# Altium PCB SIM908.PcbDoc
Units mil, origin at the board's own origin, x right, y up, seen from the top; angles counter-clockwise.
Board outline 3980.32 x 2716.54 mil, 2 copper layers (Top Layer, Bottom Layer); 100 components, 138 nets, 508 pads, 108 vias.
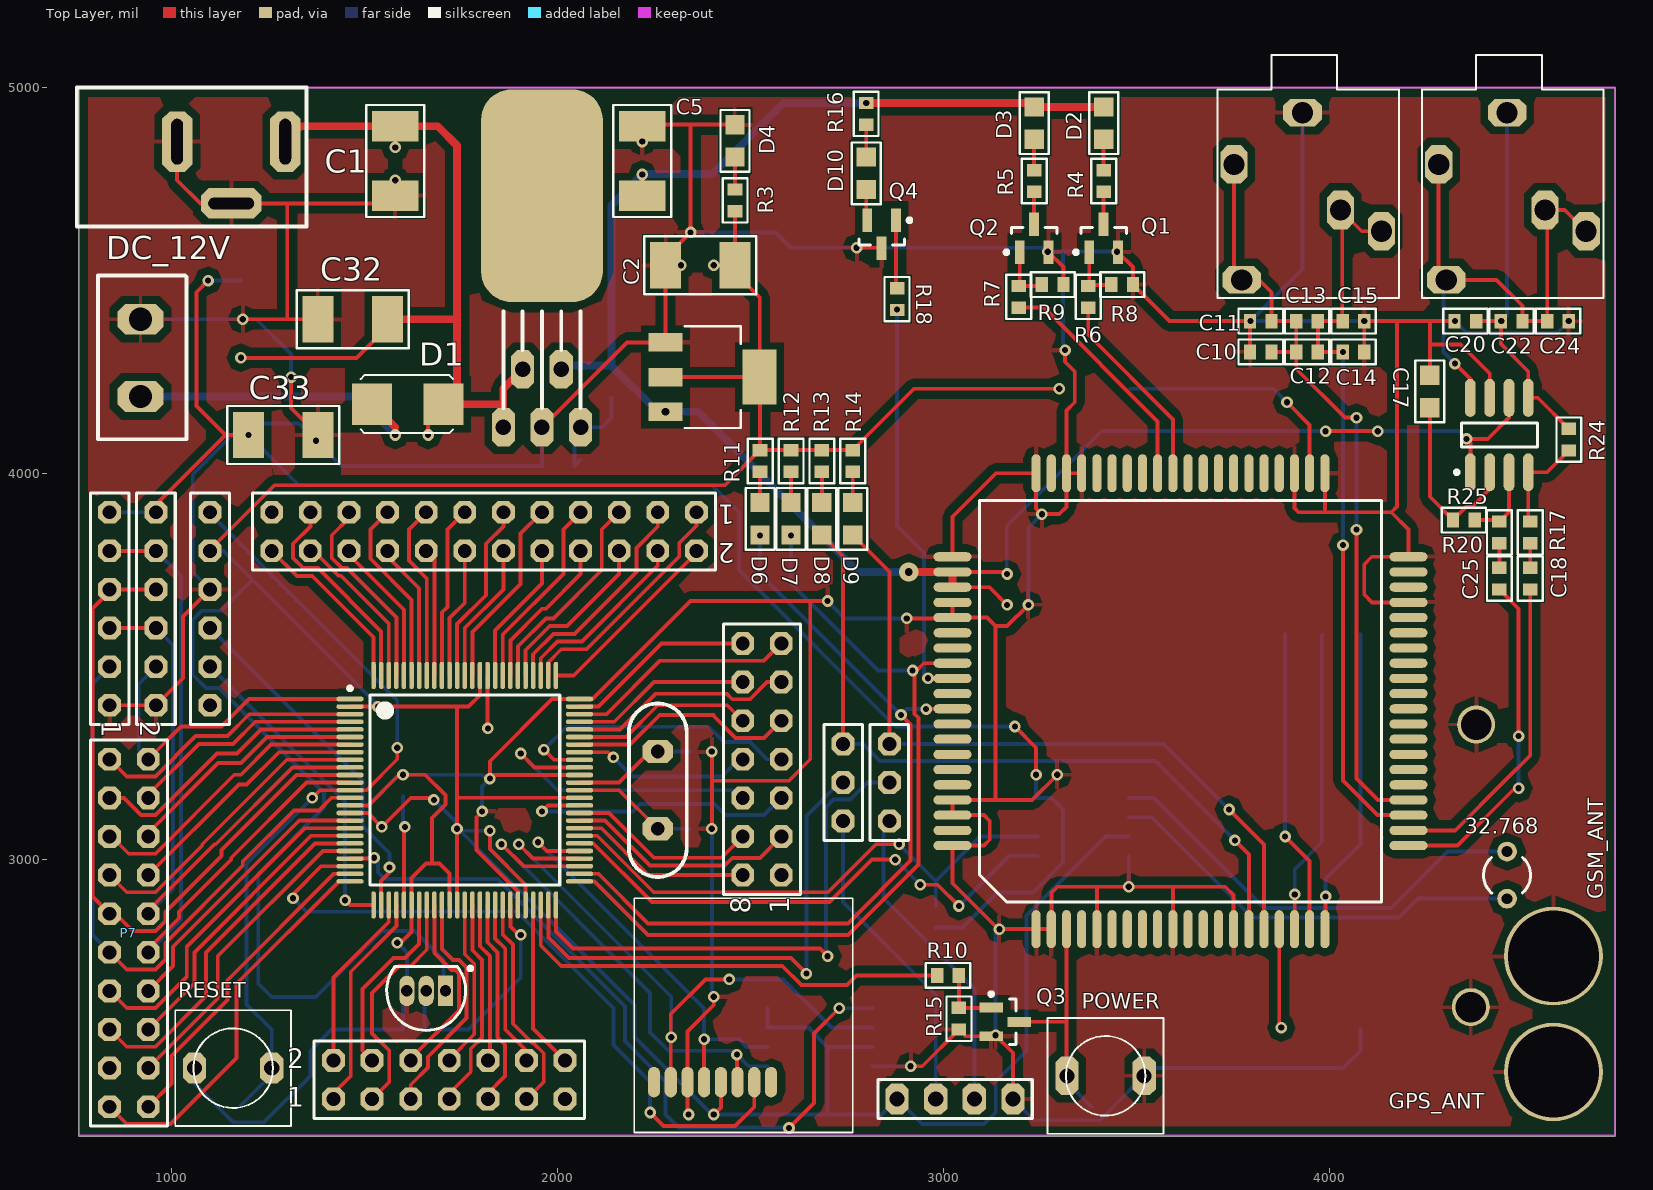
[diagram p0: Top Layer view]
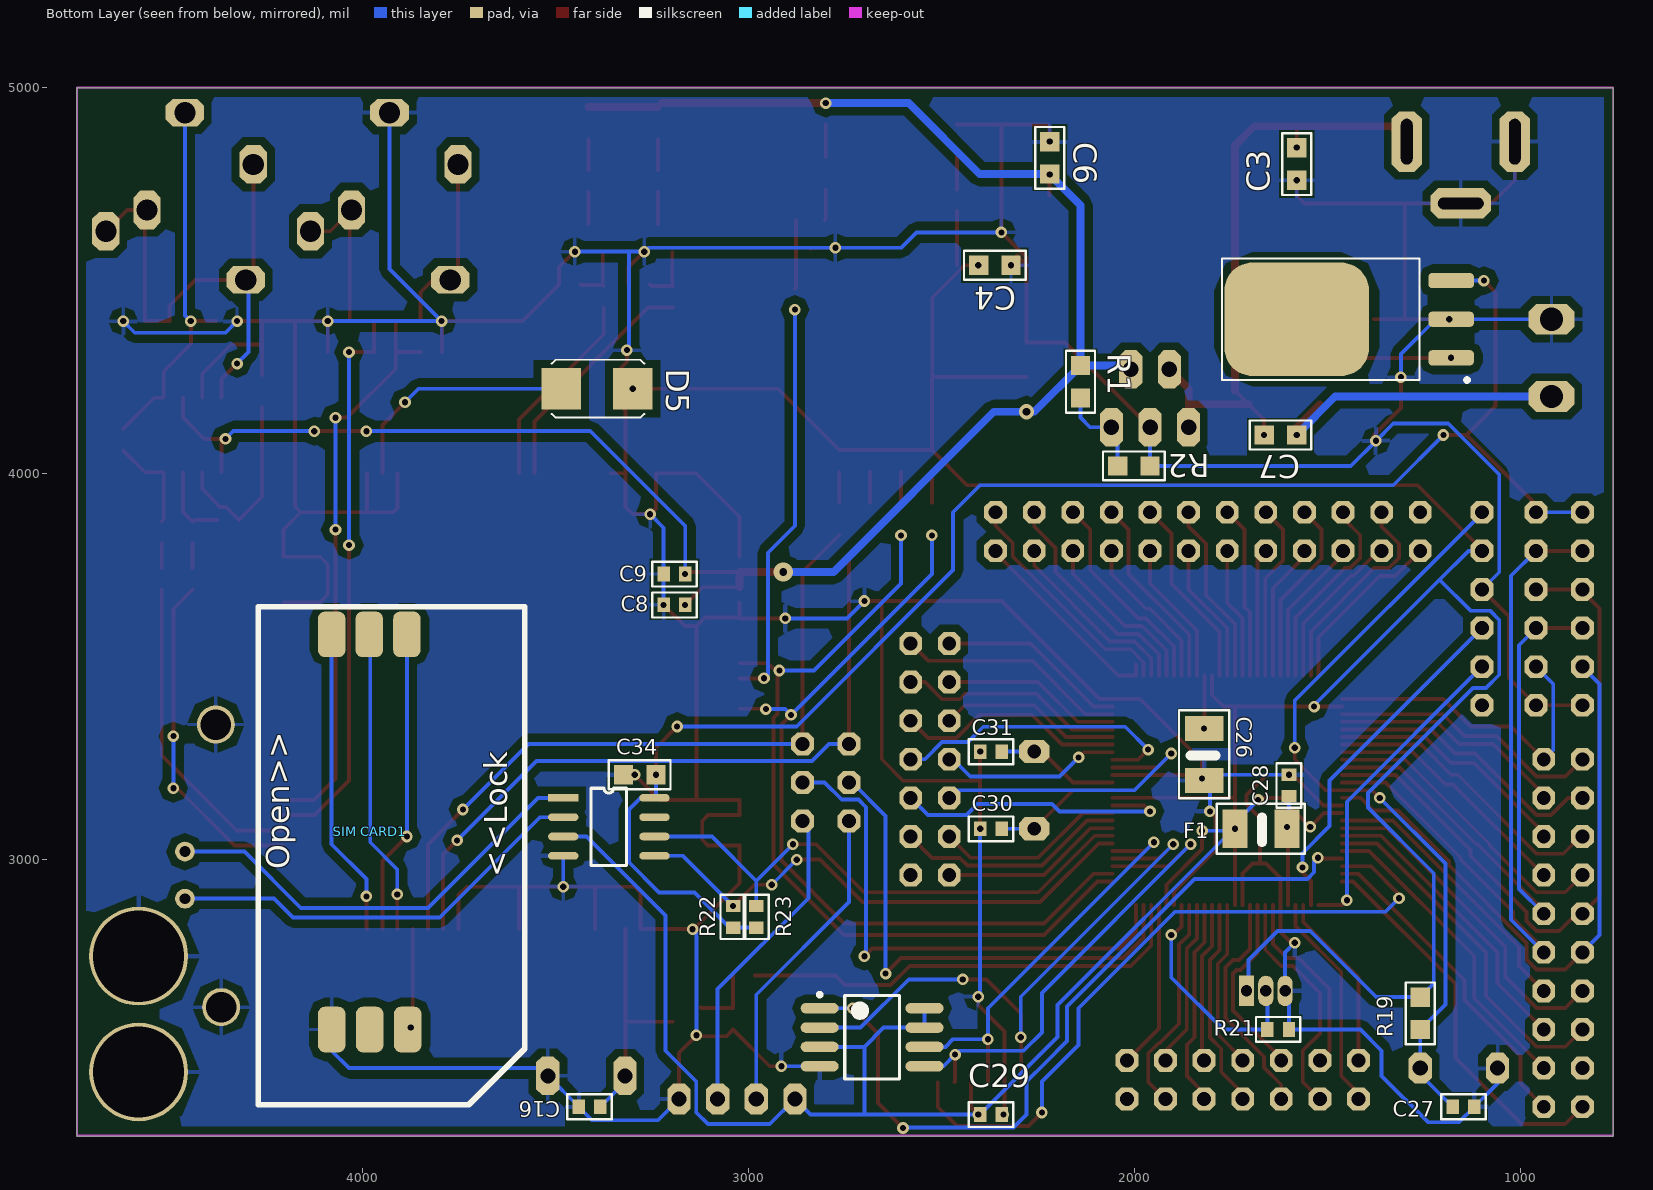
[diagram p1: Bottom Layer view, seen from below]

## Layer stack, top to bottom
Top Layer: signal copper 1.4
Dielectric: dielectric 12.6, FR-4, Dk 4.8
Bottom Layer: signal copper 1.4

## Board outline
759.84,5000 4740.16,5000 4740.16,2283.46 759.84,2283.46 759.84,5000

## Design rules (kind name [scope] priority, off if disabled: settings)
Clearance Clearance_1 [InNamedPolygon('TOP') Or  InNamedPolygon('BOT')] p1: gap=20
Clearance [All] p2: gap=10
FabricationTestPointUsage TestPointUsage [All] p1: valid=0 allowmultiple=FALSE
FabricationTestpoint Testpoint [All] p1: side=3 testpointundercomponent=TRUE minsize=40 maxsize=100 preferedsize=60 minholesize=0 maxholesize=40 preferedholesize=32 testpointgrid=1 allowsidetop=TRUE allowsidebottom=TRUE usegrid=TRUE gridtolerance=0.01
PolygonConnect [All] p1: connectstyle=Relief reliefconductorwidth=10 reliefentries=4 polygonreliefangle="90 Angle"
RoutingVias [All] p1: holewidth=16 width=30 viastyle="Through Hole" minholewidth=16 minwidth=30 maxholewidth=16 maxwidth=30
SilkscreenOverComponentPads [All] p1: minsilkscreentomaskgap=10
SolderMaskExpansion [All] p1: expansion=4
Width [All] p1: maxlimit=10 minlimit=10 preferedwidth=10
25 further rules are at their usual default settings.

## Components (designator, comment, footprint, x,y, rotation, side; value= is the part's Value field where it differs from the comment)
1 "8MHz" CRYSTAL 2260,3280 r270 top
25LC1024 "25LC1024" SOIC208-8_M 2680,2540 r180 bottom
32.768 "XTAL" R38 4460,2960 r0 top (schematic designator 32.768MHz)
C1 "Cap Pol3" SM/C_1812 1580,4900 r270 top
C2 "Cap Pol3" SM/C_1812 2460,4540 r180 top
C3 "Cap" SM/C_0805 1580,4760 r90 bottom
C4 "Cap" SM/C_0805 2320,4540 r0 bottom
C5 "Cap2" SM/C_1812 2220,4720 r90 top
C6 "Cap Semi" SM/C_0805 2220,4860 r270 bottom
C7 "Cap" SM/C_0805 1580,4100 r0 bottom
C8 "Cap" SM/C_0603 3220,3660 r180 bottom
C9 "Cap" SM/C_0603 3220,3740 r180 bottom
C10 "Cap Semi" SM/C_0603 3850,4315 r180 top
C11 "Cap Semi" SM/C_0603 3850,4395 r180 top
C12 "Cap Semi" SM/C_0603 3970,4315 r180 top
C13 "Cap Semi" SM/C_0603 3970,4395 r180 top
C14 "Cap Semi" SM/C_0603 4090,4315 r180 top
C15 "Cap Semi" SM/C_0603 4090,4395 r180 top
C16 "Cap" SM/C_0603 3440,2360 r180 bottom
C17 "Cap" SM/C_0805 4260,4255 r270 top
C18 "Cap" SM/C_0603 4520,3700 r90 top
C20 "Cap Semi" SM/C_0603 4380,4395 r180 top
C22 "Cap Semi" SM/C_0603 4500,4395 r180 top
C24 "Cap Semi" SM/C_0603 4620,4395 r180 top
C25 "Cap" SM/C_0603 4440,3700 r90 top
C26 "Cap Semi" SM/C_1210 1820,3340 r270 bottom
C27 "Cap" SM/C_0603 1120,2360 r0 bottom
C28 "Cap Semi" SM/C_0603 1600,3220 r270 bottom
C29 "Cap" SM/C_0603 2400,2340 r180 bottom
C30 "Cap Semi" SM/C_0603 2400,3080 r180 bottom
C31 "Cap Semi" SM/C_0603 2400,3280 r180 bottom
C32 "Cap" SM/C_1812 1380,4400 r0 top
C33 "Cap" SM/C_1812 1380,4100 r180 top
C34 "Cap" SM/C_0805 3240,3220 r0 bottom
D1 "M7" SM/DO214AA_21 1520,4180 r180 top
D2 "LED0" SM/C_0805 3415,4950 r270 top
D3 "LED0" SM/C_0805 3235,4950 r270 top
D4 "LED0" SM/C_0805 2460,4820 r90 top
D5 "Diode" SM/DO214AA_21 3300,4220 r180 bottom
D6 "LED0" SM/C_0805 2525,3925 r270 top
D7 "LED0" SM/C_0805 2605,3925 r270 top
D8 "LED0" SM/C_0805 2685,3925 r270 top
D9 "LED0" SM/C_0805 2765,3925 r270 top
D10 "LED0" SM/C_0805 2800,4820 r270 top
DC_12V "Jac_DC" Jac_DC 560,4720 r0 top (schematic designator DC_1)
DS1307 "DS1307" DS1307 3480,3160 r180 bottom
F1 "Inductor" SM/C_1210 1740,3080 r180 bottom
LM4871 "LM4871" D008_M 4440,4100 r90 top
MicroSDCard1 "MicroSDCard" "MICROSD CARD" 2640,2900 r180 top
P1 "Battery connector" HEADERCN02B 920,4400 r270 top
P2 "ICD2" HDR1X6 1100,3900 r270 top
P3 "JacAudio" JACK_A_3.5MM_REV5_2 3930,4935 r270 top
P4 "JacAudio" JACK_A_3.5MM_REV5_2 4460,4935 r270 top
P5 "Header 12X2" HDR2X12 2360,3900 r180 top
P6 "Header 7X2" HDR2X7 1420,2380 r0 top
P7 "Header 10X2" HDR2X10 840,3260 r270 top
P8 "Header 7X2A" HDR2X7_CEN 2580,2960 r90 top
P9 "Header 6" HDR1X6 960,3400 r90 top
P10 "Header 3" HDR1X3 2740,3100 r90 top
P11 "Header 3" HDR1X3 2860,3100 r90 top
P12 "Header 4" HDR1X4 2880,2380 r0 top
P13 "Header 6" HDR1X6 840,3400 r90 top
POWER "SW-PB" KEYSMALL2#1 3520,2440 r180 top (schematic designator S1)
Q1 "2N3904" 2N3904 3415,4610 r90 top
Q2 "2N3904" 2N3904 3235,4610 r90 top
Q3 "2N3904" 2N3904 3160,2580 r0 top
Q4 "2N3906" 2N3904 2840,4620 r270 top
R1 "Res Semi" SM/C_0805 2140,4280 r270 bottom
R2 "Res Semi" SM/C_0805 1960,4020 r0 bottom
R3 "Res1" SM/C_0603 2460,4680 r90 top
R4 "Res1" SM/C_0603 3415,4730 r90 top
R5 "Res1" SM/C_0603 3235,4730 r90 top
R6 "Res1" SM/C_0603 3375,4430 r90 top
R7 "Res1" SM/C_0603 3195,4430 r90 top
R8 "Res1" SM/C_0603 3435,4490 r0 top
R9 "Res1" SM/C_0603 3255,4490 r0 top
R10 "Res1" SM/C_0603 3040,2700 r180 top
R11 "Res1" SM/C_0603 2525,4005 r90 top
R12 "Res1" SM/C_0603 2605,4005 r90 top
R13 "Res1" SM/C_0603 2685,4005 r90 top
R14 "Res1" SM/C_0603 2765,4005 r90 top
R15 "Res1" SM/C_0603 3040,2560 r90 top
R16 "Res1" SM/C_0603 2800,4960 r270 top
R17 "Res1" SM/C_0603 4520,3820 r90 top
R18 "Res1" SM/C_0603 2880,4480 r270 top
R19 "Res Semi" SM/C_0805 1260,2560 r90 bottom
R20 "Res1" SM/C_0603 4440,3820 r90 top
R21 "Res1" SM/C_0603 1600,2560 r0 bottom
R22 "Res1" SM/C_0603 3040,2880 r270 bottom
R23 "Res1" SM/C_0603 2980,2880 r270 bottom
R24 "Res1" SM/C_0603 4620,4060 r90 top
R25 "Res1" SM/C_0603 4320,3880 r0 top
RESET "SW-PB" KEYSMALL2#2 1060,2460 r0 top (schematic designator S2)
SIM1 "SIM908" SIM908 3240,2820 r90 top
"SIM CARD1" "SIM CARD" SIMCARD6pin 4080,2560 r90 bottom
U1 "MIC29302ADJ" MIC29302 1860,4120 r0 top
U2 "" SM/SOT223_1234 2280,4340 r270 top
U3 "DSPIC33FJ128MC710T-I/PT" TQFP-PF100_N 1760,3180 r0 top
U4 "LM35CZ" Z03A 1660,2660 r90 top
UA7805C "UA7805C" UA7805C 1380,4400 r0 bottom

## Footprints (in the part's own frame and the unit in brackets; to place one, negate y for a bottom-side part, rotate by r counter-clockwise, add the part's x,y. Pads: shape width x height; smd on the part's side, far side on the other; paste and mask are expansions set on the pad)
2N3904 [mm] "2N3904"
  rect 1.55x0.65 smd: 1(-0.925,-0.95) 2(-0.925,0.95) 3(0.925,0)
  silkscreen extent -1.05,-1.5 0.7,1.95, body extent -0.7,-1.5 0.7,1.5, height 1.1
CRYSTAL [mil]
  oct 60x80 hole 36: 1(0,0) 2(200,0)
  silkscreen extent -125,-75 325,75
D008_M [mm] "8-Pin Small Outline Integrated Circuit 1.27 mm Pitch, IPC Low Density"
  oval 2.5x0.7 smd: 1(-2.45,1.905) 2(-2.45,0.635) 3(-2.45,-0.635) 4(-2.45,-1.905) 5(2.45,-1.905) 6(2.45,-0.635) 7(2.45,0.635) 8(2.45,1.905)
  silkscreen extent -2.57,-2.5 0.8,2.93, body extent -2,-2.5 2,2.5, height 1.75
DS1307 [mm]
  rect 2x0.5 smd: 1(0,0)
  oval 2x0.5 smd: 2(0,-1.27) 3(0,-2.54) 4(0,-3.81) 5(6,-3.81) 6(6,-2.54) 7(6,-1.27) 8(6,0)
  silkscreen extent 1.84,-4.45 4.17,0.63
HDR1X3 [mm] "Connector; Header; 3 Position"
  oct 1.5x1.5 hole 0.914: 1(0,0) 2(2.54,0) 3(5.08,0)
  silkscreen extent -1.27,-1.27 6.35,1.27
HDR1X4 [mil] "Connector; Header; 4 Position"
  oct 60x80 hole 39: 1(0,0) 2(100,0) 3(200,0) 4(300,0)
  silkscreen extent -50,-50 350,50
HDR1X6 [mm] "Connector; Header; 6 Position"
  oct 1.5x1.5 hole 0.914: 1(0,0) 2(2.54,0) 3(5.08,0) 4(7.62,0) 5(10.16,0) 6(12.7,0)
  silkscreen extent -1.27,-1.27 13.97,1.27
HDR2X7 [mm] "Connector; Header; 7x2 Position"
  oct 1.5x1.5 hole 0.914: 1(0,0) 2(0,2.54) 3(2.54,0) 4(2.54,2.54) 5(5.08,0) 6(5.08,2.54) 7(7.62,0) 8(7.62,2.54) 9(10.16,0) 10(10.16,2.54) 11(12.7,0) 12(12.7,2.54) 13(15.24,0) 14(15.24,2.54)
  silkscreen extent -1.27,-1.27 16.51,3.81
HDR2X7_CEN [mm] "Connector; Header; 7x2 Position"
  oct 1.5x1.5 hole 0.914: 1(0,0) 2(2.54,0) 3(5.08,0) 4(7.62,0) 5(10.16,0) 6(12.7,0) 7(15.24,0) 8(0,2.54) 9(2.54,2.54) 10(5.08,2.54) 11(7.62,2.54) 12(10.16,2.54) 13(12.7,2.54) 14(15.24,2.54)
  silkscreen extent -1.27,-1.27 16.51,3.81
HDR2X10 [mm] "Connector; Header; 10x2 Position"
  oct 1.5x1.5 hole 0.914: 1(0,0) 2(0,2.54) 3(2.54,0) 4(2.54,2.54) 5(5.08,0) 6(5.08,2.54) 7(7.62,0) 8(7.62,2.54) 9(10.16,0) 10(10.16,2.54) 11(12.7,0) 12(12.7,2.54) 13(15.24,0) 14(15.24,2.54) 15(17.78,0) 16(17.78,2.54) 17(20.32,0) 18(20.32,2.54) 19(22.86,0) 20(22.86,2.54)
  silkscreen extent -1.27,-1.27 24.13,3.81
HDR2X12 [mm] "Connector; Header; 12x2 Position"
  oct 1.5x1.5 hole 0.914: 1(0,0) 2(0,2.54) 3(2.54,0) 4(2.54,2.54) 5(5.08,0) 6(5.08,2.54) 7(7.62,0) 8(7.62,2.54) 9(10.16,0) 10(10.16,2.54) 11(12.7,0) 12(12.7,2.54) 13(15.24,0) 14(15.24,2.54) 15(17.78,0) 16(17.78,2.54) 17(20.32,0) 18(20.32,2.54) 19(22.86,0) 20(22.86,2.54) 21(25.4,0) 22(25.4,2.54) 23(27.94,0) 24(27.94,2.54)
  silkscreen extent -1.27,-1.27 29.21,3.81
HEADERCN02B [mil]
  oct 80x120 hole 60: 1(0,0) 2(200,0)
  silkscreen extent -113,-110 311,119
Jac_DC [mil]
  oct 78.74x157.48 hole 30 slot 118.11 at 90 deg: 0(735,140) 2(455,140)
  oct 157.48x78.74 hole 30 slot 118.11 at 0 deg: 1(595,-20)
  silkscreen extent 195,-80 790,280
JACK_A_3.5MM_REV5_2 [mil]
  oct 70.87x100 hole 55: 1(0,0) 4(433.07,-157.48)
  oct 100x70.87 hole 55: 2(307.08,204.72) 3(251.97,98.43) 5(133.85,-177.17)
  silkscreen extent -150,-220 480,250
KEYSMALL2#1 [mil]
  oct 60x100 hole 39: 1(0,0) 2(200,0)
  silkscreen extent -50,-150 250,150
KEYSMALL2#2 [mil]
  oct 60x80 hole 39: 1(0,0) 2(200,0)
  silkscreen extent -50,-150 250,150
MIC29302 [mil]
  oct 60x100 hole 40: 1(0,0) 2(50,150) 3(100,0) 4(150,150) 5(200,0)
  rrect50% 314.97x551.17 smd: 6(100,600)
  silkscreen extent 0,50 200,300
"MICROSD CARD" [mil]
  oval 31.5x78.73 smd: 1(86.6,476.3) 2(129.92,476.38) 3(173.23,476.38) 4(216.53,476.38) 5(259.85,476.38) 6(303.1,476.3) 7(346.4,476.3) 8(389.77,476.38)
  silkscreen extent -125,0 441,606
R38 [mm] "Crystal, Thru-Hole; 2 Leads; Body 3.1 x 8.2 mm (Dia.xH)"
  round 1.3 hole 0.7: 1(0,1.55) 2(0,-1.55)
  silkscreen extent -1.55,-1.19 1.55,1.17
SIM908 [mm] "SIM908"
  oval 2.5x0.6 smd: 1(0,0) 2(0,-1) 3(0,-2) 4(0,-3) 5(0,-4) 6(0,-5) 7(0,-6) 8(0,-7) 9(0,-8) 10(0,-9) 11(0,-10) 12(0,-11) 13(0,-12) 14(0,-13) 15(0,-14) 16(0,-15) 17(0,-16) 18(0,-17) 19(0,-18) 20(0,-19) 41(30,-19) 42(30,-18) 43(30,-17) 44(30,-16) 45(30,-15) 46(30,-14) 47(30,-13) 48(30,-12) 49(30,-11) 50(30,-10) 51(30,-9) 52(30,-8) 53(30,-7) 54(30,-6) 55(30,-5) 56(30,-4) 57(30,-3) 58(30,-2) 59(30,-1) 60(30,0)
  oval 0.6x2.5 smd: 21(5.5,-24.5) 22(6.5,-24.5) 23(7.5,-24.5) 24(8.5,-24.5) 25(9.5,-24.5) 26(10.5,-24.5) 27(11.5,-24.5) 28(12.5,-24.5) 29(13.5,-24.5) 30(14.5,-24.5) 31(15.5,-24.5) 32(16.5,-24.5) 33(17.5,-24.5) 34(18.5,-24.5) 35(19.5,-24.5) 36(20.5,-24.5) 37(21.5,-24.5) 38(22.5,-24.5) 39(23.5,-24.5) 40(24.5,-24.5) 61(24.5,5.5) 62(23.5,5.5) 63(22.5,5.5) 64(21.5,5.5) 65(20.5,5.5) 66(19.5,5.5) 67(18.5,5.5) 68(17.5,5.5) 69(16.5,5.5) 70(15.5,5.5) 71(14.5,5.5) 72(13.5,5.5) 73(12.5,5.5) 74(11.5,5.5) 75(10.5,5.5) 76(9.5,5.5) 77(8.5,5.5) 78(7.5,5.5) 79(6.5,5.5) 80(5.5,5.5)
  silkscreen extent 1.79,-22.72 28.22,3.71
SIMCARD6pin [mm]
  rrect50% 3x1.8 smd: 1(0,0) 2(26,0) 3(0,-2.5) 4(26,-2.477) 5(0,-5) 6(26,-4.953)
  silkscreen extent -4.95,-12.7 27.81,4.83
SM/C_0603 [mil]
  rect 32x38 smd: 1(0,0) 2(56,0)
  silkscreen extent -30,-33 86,32
SM/C_0805 [mil]
  rect 50x50 smd: 1(0,0) 2(84,0)
  silkscreen extent -38,-38 122,38
SM/C_1210 [mil]
  rect 64x100 smd: 1(0,0) 2(135,0)
  silkscreen extent -47,-65 180,65
SM/C_1812 [mil]
  rect 80x120 smd: 1(0,0) 2(180,0)
  silkscreen extent -55,-75 235,75
SM/DO214AA_21 [mil]
  rect 103x108 smd: 1(0,0) 2(-185,0)
  silkscreen extent -210,-75 30,75
SM/SOT223_1234 [mil]
  rect 48x88 smd: 1(0,0) 2(90,0) 3(180,0)
  rect 142x88 smd: 4(90,244)
  silkscreen extent -42,49 222,195
SOIC208-8_M [mm] "8-Pin Plastic Medium Body Small Outline Package 1.27 mm Pitch, IPC Low Density"
  oval 2.5x0.7 smd: 1(-3.45,1.905) 2(-3.45,0.635) 3(-3.45,-0.635) 4(-3.45,-1.905) 5(3.45,-1.905) 6(3.45,-0.635) 7(3.45,0.635) 8(3.45,1.905)
  silkscreen extent -3.57,-2.75 1.8,2.93, body extent -2.73,-2.75 2.73,2.75, height 2.04
TQFP-PF100_N [mm] "Thin QFP, 100-Leads, Body 14x14mm, Pitch 0.5mm, IPC Medium Density"
  oval 1.8x0.3 smd: 1(-7.55,6) 2(-7.55,5.5) 3(-7.55,5) 4(-7.55,4.5) 5(-7.55,4) 6(-7.55,3.5) 7(-7.55,3) 8(-7.55,2.5) 9(-7.55,2) 10(-7.55,1.5) 11(-7.55,1) 12(-7.55,0.5) 13(-7.55,0) 14(-7.55,-0.5) 15(-7.55,-1) 16(-7.55,-1.5) 17(-7.55,-2) 18(-7.55,-2.5) 19(-7.55,-3) 20(-7.55,-3.5) 21(-7.55,-4) 22(-7.55,-4.5) 23(-7.55,-5) 24(-7.55,-5.5) 25(-7.55,-6) 51(7.55,-6) 52(7.55,-5.5) 53(7.55,-5) 54(7.55,-4.5) 55(7.55,-4) 56(7.55,-3.5) 57(7.55,-3) 58(7.55,-2.5) 59(7.55,-2) 60(7.55,-1.5) 61(7.55,-1) 62(7.55,-0.5) 63(7.55,0) 64(7.55,0.5) 65(7.55,1) 66(7.55,1.5) 67(7.55,2) 68(7.55,2.5) 69(7.55,3) 70(7.55,3.5) 71(7.55,4) 72(7.55,4.5) 73(7.55,5) 74(7.55,5.5) 75(7.55,6)
  oval 0.3x1.8 smd: 26(-6,-7.55) 27(-5.5,-7.55) 28(-5,-7.55) 29(-4.5,-7.55) 30(-4,-7.55) 31(-3.5,-7.55) 32(-3,-7.55) 33(-2.5,-7.55) 34(-2,-7.55) 35(-1.5,-7.55) 36(-1,-7.55) 37(-0.5,-7.55) 38(0,-7.55) 39(0.5,-7.55) 40(1,-7.55) 41(1.5,-7.55) 42(2,-7.55) 43(2.5,-7.55) 44(3,-7.55) 45(3.5,-7.55) 46(4,-7.55) 47(4.5,-7.55) 48(5,-7.55) 49(5.5,-7.55) 50(6,-7.55) 76(6,7.55) 77(5.5,7.55) 78(5,7.55) 79(4.5,7.55) 80(4,7.55) 81(3.5,7.55) 82(3,7.55) 83(2.5,7.55) 84(2,7.55) 85(1.5,7.55) 86(1,7.55) 87(0.5,7.55) 88(0,7.55) 89(-0.5,7.55) 90(-1,7.55) 91(-1.5,7.55) 92(-2,7.55) 93(-2.5,7.55) 94(-3,7.55) 95(-3.5,7.55) 96(-4,7.55) 97(-4.5,7.55) 98(-5,7.55) 99(-5.5,7.55) 100(-6,7.55)
  silkscreen extent -7.67,-6.25 6.25,6.82, body extent -7,-7 7,7, height 1.2
UA7805C [mm] "SOT223, 4-Leads, Body 6.5x3.5mm, Pitch 2.3mm, Lead Span 7mm, IPC Low Density"
  rrect50% 3x1 smd: 1(-5.08,2.54) 2(-5.08,0) 3(-5.08,-2.54)
  rrect50% 9.52x7.49 smd: 4(5.08,0)
  silkscreen extent -6.25,-4 10,4.12
Z03A [mm] "TO, Flat Index; 3 In-Line, Axial Leads; Body Dia. 5mm; Leads 0.55 x 0.50 mm (max)"
  rect 2x1 hole 0.75: 1(0,-1.27)
  oval 2x1 hole 0.75: 2(0,0) 3(0,1.27)
  silkscreen extent -2.6,-3.03 1.6,2.6, body extent -2.61,-2.61 1.6,2.61, height 5.2

## Part data
1: library part XTAL, "Crystal Oscillator"
32.768: "Crystal Oscillator"
C1 C2: "Polarized Capacitor (Surface Mount)"
C3 C4 C5 C7 C8 C9 C16 C17 C18 C25 C27 C29 C32 C33 C34: "Capacitor"
C6 C10 C11 C12 C13 C14 C15 C20 C22 C24 C26 C28 C30 C31: "Capacitor (Semiconductor SIM Model)"
D1: library part "Diode 1N4007", "1 Amp General Purpose Rectifier"
D2 D3 D4 D6 D7 D8 D9 D10: "Typical INFRARED GaAs LED"
D5: "Default Diode"
P1: library part "Header 2", "Header, 2-Pin"
P2: library part "Header 6", "Header, 6-Pin"
P5: "Header, 12-Pin, Dual row"
P6 P8: "Header, 7-Pin, Dual row"
P7: "Header, 10-Pin, Dual row"
P9 P13: "Header, 6-Pin"
P10 P11: "Header, 3-Pin"
P12: "Header, 4-Pin"
POWER RESET: "Switch"
Q1 Q2 Q3: "NPN General Purpose Amplifier"
Q4: "PNP General Purpose Amplifier"
R1 R2 R19: "Semiconductor Resistor"
R3 R4 R5 R6 R7 R8 R9 R10 R11 R12 R13 R14 R15 R16 R17 R18 R20 R21 R22 R23 R24 R25: "Resistor"
U2: library part LM1117MP-3.3, "800mA Low-Dropout Linear Regulator"
U3: "High-Performance 16-bit Digital Signal Controller, 128 KB Flash, 16 KB RAM, 100-Pin TQFP, Industrial Temperature, Tape and Reel"
U4: "Precision Centigrade Temperature Sensor"

## Free pads (board coordinates)
  round 255.91 hole 236.22: 0(4580,2450) 1(4580,2750)
  round 98.43 hole 78.74: 2(4380,3350) 3(4366.14,2618.11)

## Via types
v1: diameter 30, hole 16, Top Layer to Bottom Layer, 106 vias
v2: diameter 50, hole 20, Top Layer to Bottom Layer, 1 vias
v3: diameter 40, hole 20, Top Layer to Bottom Layer, 1 vias

## Nets (pads, with @x,y where several pads share a name; then routed paths per layer and width w, separated by ;. In a path a pad name is that pad's centre, name@x,y a point inside that pad or via, vN(x,y) a via of type N, cw(c..) or ccw(c..) an arc to the next point about the centre after c; other vN are vias at no path point)
1: P7.2 P9.2 U3.1 | length 890
  Top Layer w10: P7.2 1025,3345 1130,3345 1201.22,3416.22 U3.1 U3.1@1428.78,3416.22
  Bottom Layer w10: P7.2 915.47,3284.53 915.47,3455.47 P9.2
3: P7.1 U3.3 | length 708
  Top Layer w10: P7.1 884.53,3215.47 958.44,3215.47 1062.97,3320 1145,3320 1201.85,3376.85 U3.3
3.3V: 25LC1024.3 25LC1024.7 25LC1024.8 C2.1 C4.2 C29.1 D5.1 DS1307.3 F1.1 MicroSDCard1.4 P2.2 P12.1 R3.1 R11.2 R12.2 R13.2 R14.2 R19.2 U2.2 U2.4 U3.2 U3.16 U3.37 U3.46 U3.62 U3.86 U4.1 | length 11296.4
  Top Layer w10: P2.2 1100,3802.97 1267.03,3970 2433.79,3970 2524.79,4061 R11.2 ; U3.16 1509.06,3120.94 v1(1545,3085) 1620,3160 1675,3160 v1(1680,3155) ; U3.2 v1(1535,3396.54) 1745,3396.54 ; v1(1740,3080) 1740,3165 ; U3.37 v1@1740.32,3079.68 ; U3.86 1799.37,3425.91 1770,3396.54 1745,3396.54 ; v1(1825,3075) 1825,3027.57 ; 1905,2947.57 1825,3027.57 ; U3.46 1917.48,2935.09 1825,3027.57 ; U3.62 1744.68,3160.32 1740,3165 ; U2.2 U2.4 ; v1(2405,2340) 2423.47,2358.47 MicroSDCard1.4 ; v1(2405,4540) 2440,4540 2524,4456 U2.4 ; C2.1 R3.1 ; R11.2@2524,4062 R11.2 ; v1(3300,4220) 2924,4220 R14.2 R13.2 R12.2 R11.2 ; 1740,3165 1740,3391.54 1745,3396.54 ; U2.4 2525,4249 R11.2
  Bottom Layer w10: P2.2 1135,3800 1210,3725 ; R19.2@1260,2645 R19.2 ; v1(1535,3396.54) 1535,3400 1210,3725 ; v1(1680,3155) 1740,3095 v1(1740,3080) F1.1@1745,3075 ; U4.1 1705,2665 1705,2740 1630,2815 1545,2815 1374,2644 R19.2 ; v1(1825,3075) F1.1@1745,3075 ; C4.2 v1(2405,4540) ; 25LC1024.8 25LC1024.7 2650,2565 2700,2515 ; 25LC1024.3 2700,2515 ; DS1307.3 3420,3060 3215,2855 3215,2505 3135.47,2425.47 3135.47,2345.47 3105,2315 2945,2315 P12.1 2840,2340 2700,2340 ; 1210,3725 1130,3645 1079.5,3645 1055.47,3620.98 1055.47,3479.02 1089.97,3444.53 1122.9,3444.53 1395,3172.43 1395,3135 1225,2965 1225,2679 R19.2 ; F1.1@1745,3075 1748.28,3075 2200,2623.28 2200,2540.21 2400,2340.21 C29.1 v1(2405,2340) 2700,2340 ; 2700,2340 2700,2515
4: P7.4 U3.4 | length 609.5
  Top Layer w10: P7.4 940,3168.74 1071.26,3300 1160,3300 1217.17,3357.17 U3.4
4.2V: C5.1 C6.2 C8.2 C9.2 D2.1 D3.1 LM4871.1 LM4871.6 R1.1 R16.1 SIM1.62 SIM1.63 U1.4 U2.3 | length 5148.4
  Top Layer w10: C5.1 v1(2220,4775) ; U2.3@2275,4160 v3(2280,4160) ; SIM1.62@3023.27,3745 SIM1.62 3159.8,3745.2 v1(3165,3740) ; SIM1.63 3119.17,3705.83 v1(3165,3660) ; D3.1@3225,4960 D3.1 ; v1(3990,4110) v1(4125,4110) ; LM4871.1 4365,4080 v1(4355,4090) 4410,4090 4465,4145 LM4871.6
  Top Layer w20: v1(2800,4960) D3.1@3225,4960 ; v2(2910,3745) SIM1.62@3023.27,3745 ; SIM1.63 SIM1.62 ; D3.1 D2.1
  Bottom Layer w10: U1.4 U1.4@2020,4280 ; v1(2220,4775) C6.2 ; v3@2260,4160 v3(2280,4160) ; C8.2 v1(3165,3660) ; C9.2 3164,3864 3410,4110 v1(3990,4110) ; v1(4125,4110) 4335,4110 v1(4355,4090)
  Bottom Layer w20: U1.4@2020,4280 R1.1 ; v1(2220,4775) 2140,4695 R1.1 ; C6.2 2401,4776 2585,4960 v1(2800,4960) ; v3@2260,4160 R1.1 ; v3(2280,4160) 2365,4160 2780,3745 v2(2910,3745)
5: P7.3 U3.5 | length 733.2
  Top Layer w10: P7.3 877.03,3160 921.56,3115.47 958.44,3115.47 1117.97,3275 1170,3275 1232.48,3337.48 U3.5
5V: C33.2 C34.1 DS1307.8 P9.6 P13.6 R22.2 R23.2 UA7805C.3 | length 4193.5
  Top Layer w10: P9.6 960,3920 1140,4100 ; v1(1095,4500) 1065,4470 1065,4175 1140,4100 ; v1(1200,4100) 1140,4100 ; v1(3185,3345) 3240,3290 v1(3240,3220)
  Bottom Layer w10: P13.6 P9.6 ; v1(1095,4500) UA7805C.3 ; v1(1200,4100) 1330,3970 2400,3970 2470,3900 2470,3750 2875,3345 v1(3185,3345) ; R23.2 R22.2 3049,2824 3140,2915 3231.72,2915 3310,2993.28 3310,3130 3280,3160 DS1307.8 3240,3163.78 v1(3240,3220)
6: P7.6 U3.6 | length 634.7
  Top Layer w10: P7.6 940,3068.74 1121.26,3250 1180,3250 1247.8,3317.8 U3.6
7: P7.5 U3.7 | length 758.3
  Top Layer w10: P7.5 845,3060 889.53,3015.47 958.44,3015.47 1162.97,3220 1180,3220 1258.11,3298.11 U3.7
8: P7.8 U3.8 | length 654.7
  Top Layer w10: P7.8 1175,3195 1195,3195 1278.43,3278.43 U3.8
9: P7.7 U3.9 | length 786.9
  Top Layer w10: P7.7 884.53,2915.47 958.44,2915.47 1080,3037.03 1080,3040 1298.74,3258.74 U3.9 U3.9@1461.5,3260
10: P7.10 P9.3 P13.3 U3.10 | length 1590.1
  Top Layer w10: P13.3 P9.3 ; P7.10 940,2868.74 1111.26,3040 1115,3040 1314.06,3239.06 U3.10
  Bottom Layer w10: P7.10 1004.53,2924.53 1004.53,3555.47 P9.3
11: P7.9 P9.4 P13.4 U3.11 | length 1827.6
  Top Layer w10: P9.4 P13.4 840,3695 795.47,3650.47 795.47,2904.53 P7.9 855.47,2860 900,2815.47 958.44,2815.47 984.53,2841.56 984.53,2864.53 1130,3010 1130,3025 1324.37,3219.37 U3.11
12: P7.12 P9.5 P13.5 U3.12 | length 1944.2
  Top Layer w10: P13.5 P9.5 ; P7.12 940,2768.28 1020,2848.28 1020,2865 1155,3000 1155,3005 1349.68,3199.68 U3.12
  Bottom Layer w10: P7.12 1024.53,2844.53 1024.53,3735.47 P9.5
14: P7.11 P13.2 U3.14 | length 1633.4
  Top Layer w10: P7.11 884.53,2715.47 958.44,2715.47 984.53,2741.56 984.53,2784.53 1185,2985 1185,2995 1317.5,3127.5 1382.18,3127.5 1415,3160.32 U3.14
  Bottom Layer w10: P7.11 795.47,2804.53 795.47,3455.47 P13.2
17: P7.14 U3.17 | length 734.8
  Top Layer w10: P7.14 1004.53,2724.53 1004.53,2774.53 1331.26,3101.26 U3.17
18: P7.13 U3.18 | length 879.9
  Top Layer w10: P7.13 884.53,2615.47 958.44,2615.47 1040,2697.03 1040,2775 1346.57,3081.57 U3.18
19: P7.16 U3.19 | length 777.5
  Top Layer w10: P7.16 1060,2680 1060,2760 1361.89,3061.89 U3.19
20: P7.15 U3.20 | length 925.6
  Top Layer w10: P7.15 884.53,2515.47 958.44,2515.47 1090,2647.03 1090,2760 1372.2,3042.2 U3.20
21: P7.18 U3.21 | length 820.2
  Top Layer w10: P7.18 1120,2640 1120,2750 1392.52,3022.52 U3.21
22: P7.17
24: P7.20 U3.24 | length 844.1
  Top Layer w10: P7.20 1000,2420 1000,2491.72 1145,2636.72 1145,2687.57 1419.98,2962.56 1422.44,2962.56 ; 1422.44,2963.46 U3.24
25: P7.19 U3.25 | length 1014.2
  Top Layer w10: P7.19 884.53,2315.47 997.92,2315.47 1168.72,2486.28 1168.72,2678.72 1433.78,2943.78 U3.25
28: P6.2 U3.28 | length 462.1
  Top Layer w10: P6.2 1420,2695 1563.15,2838.15 U3.28
29: P6.1 U3.29 | length 570.2
  Top Layer w10: P6.1 1420,2395 1464.53,2439.53 1464.53,2709.53 1582.83,2827.83 U3.29
32: P6.4 U3.32 | length 491.5
  Top Layer w10: P6.4 1495,2505 1495,2665 1575,2745 1605,2745 1641.89,2781.89 U3.32
33: P6.3 U3.33 | length 615.9
  Top Layer w10: P6.3 1564.53,2424.53 1564.53,2505.47 1520,2550 1520,2655 1590,2725 1620,2725 1661.57,2766.57 U3.33
34: P6.6 U3.34 | length 486.7
  Top Layer w10: P6.6 1620,2485 1744.69,2609.69 1744.69,2705.58 1735.9,2714.37 1725.63,2714.37 1681.26,2758.74 U3.34
35: P6.5 U3.35 | length 597.9
  Top Layer w10: P6.5 1620,2417.03 1664.53,2461.56 1664.53,2489.53 1764.69,2589.69 1764.69,2720.31 1745,2740 1730,2740 1700.94,2769.06 U3.35
38: P6.8 U3.38 | length 439.8
  Top Layer w10: P6.8 1720,2482.97 1784.69,2547.66 1784.69,2730.31 1760,2755 U3.38
39: P6.7 U3.39 | length 548.2
  Top Layer w10: P6.7 1720,2395 1775.47,2450.47 1775.47,2510.16 1804.69,2539.37 1804.69,2740.31 1779.68,2765.32 U3.39
40: P6.10 U3.40 | length 415.4
  Top Layer w10: U3.40 1799.37,2775.63 1825,2750 1825,2485 P6.10
41: P6.9 U3.41 | length 540
  Top Layer w10: U3.41 1819.06,2785.94 1845,2760 1845,2540 1864.53,2520.47 1864.53,2439.53 1820,2395 P6.9
42: P6.12 U3.42 | length 436.4
  Top Layer w10: U3.42 1838.74,2796.26 1865,2770 1865,2560 1920,2505 P6.12
43: P6.11 U3.43 | length 566.9
  Top Layer w10: U3.43 1858.43,2806.57 1885,2780 1885,2575 1935.47,2524.53 1938.44,2524.53 1964.53,2498.44 1964.53,2424.53 P6.11
47: P6.14 U3.47 | length 437.1
  Top Layer w10: U3.47 1937.17,2562.83 P6.14
57: P8.1 | length 15
  Top Layer w10: P8.1@2570,2960 P8.1 P8.1@2580,2955
58: P8.8 U3.58 | length 473.1
  Top Layer w10: U3.58 2113.43,3081.57 2235,2960 P8.8
59: P8.2 U3.59 | length 602
  Top Layer w10: U3.59 2123.74,3101.26 2240,2985 2433.28,2985 2452.81,3004.53 2524.53,3004.53 P8.2
60: P8.9 U3.60 | length 493.6
  Top Layer w10: U3.60 2134.06,3120.94 2250,3005 2425,3005 P8.9
61: P8.3 U3.61 | length 762
  Top Layer w10: v1(1960,3125) 1975.63,3140.63 U3.61
  Bottom Layer w10: v1(1960,3125) 2194.97,3125 2214.18,3144.22 2406.73,3144.22 2435.47,3115.47 2535.47,3115.47 P8.3
66: P8.10 U3.66 | length 789.8
  Top Layer w10: v1(1905,3275) 1940.94,3239.06 U3.66
  Bottom Layer w10: v1(1905,3275) 2000,3180 2460,3180 P8.10
67: P8.4 U3.67 | length 777.5
  Top Layer w10: v1(1965,3285) 1991.26,3258.74 U3.67
  Bottom Layer w10: v1(1965,3285) 2024.22,3344.22 2392,3344.22 2431.69,3304.53 2498.44,3304.53 2542.97,3260 P8.4
68: P8.11 U3.68 | length 467
  Top Layer w10: U3.68 2131.57,3278.43 v1(2145,3265)
  Bottom Layer w10: v1(2145,3265) 2194.22,3215.78 2425.78,3215.78 2470,3260 P8.11
69: P8.5 U3.69 | length 599.4
  Top Layer w10: U3.69 2188.11,3298.11 2265,3375 2405,3375 2405,3372.03 2461.56,3315.47 2535.47,3315.47 P8.5
70: P8.12 U3.70 | length 473.4
  Top Layer w10: U3.70 2177.8,3317.8 2260,3400 2440,3400 P8.12
71: P8.6 U3.71 | length 585.5
  Top Layer w10: U3.71 2162.48,3337.48 2255,3430 2438.28,3430 2452.81,3415.47 2498.44,3415.47 2542.97,3460 P8.6
72: P8.13 U3.72 | length 465.4
  Top Layer w10: U3.72 2147.17,3357.17 2250,3460 P8.13
73: P8.7 U3.73 | length 598.6
  Top Layer w10: U3.73 2126.85,3376.85 2265.47,3515.47 2535.47,3515.47 P8.7
74: P8.14 U3.74 | length 490.5
  Top Layer w10: U3.74 2106.54,3396.54 2270,3560 P8.14
76: P5.2 U3.76 | length 529.4
  Top Layer w10: U3.76@1996.22,3506.22 U3.76 2042.24,3477.24 2085,3520 2360,3795 P5.2
77: P5.1 U3.77 | length 619.7
  Top Layer w10: U3.77 1976.54,3511.54 2010,3545 2075,3545 2315.47,3785.47 2315.47,3820.47 2360,3865 P5.1
78: P5.4 U3.78 | length 485.4
  Top Layer w10: U3.78 1956.85,3521.85 2000,3565 2063.28,3565 2260,3761.72 P5.4
79: P5.3 U3.79 | length 588.4
  Top Layer w10: U3.79 1937.17,3532.17 1990,3585 2044.53,3585 2204.53,3745 2204.53,3807.5 2260,3862.97 P5.3
80: P5.6 U3.80 | length 449.6
  Top Layer w10: U3.80 1917.48,3542.48 1980,3605 2025,3605 2160,3740 P5.6
81: P5.5 U3.81 | length 543.1
  Top Layer w10: U3.81 1897.8,3552.8 1970,3625 1990,3625 2115,3750 2115,3855 P5.5
82: P5.8 U3.82 | length 404
  Top Layer w10: U3.82 1878.11,3568.11 1960,3650 1970,3650 2060,3740 P5.8
83: P5.7 U3.83 | length 506.3
  Top Layer w10: U3.83 1858.43,3583.43 2015.47,3740.47 2015.47,3855.47 P5.7
84: P5.10 U3.84 | length 373
  Top Layer w10: U3.84 1838.74,3593.74 1960,3715 P5.10
87: P5.9 U3.87 | length 497.4
  Top Layer w10: U3.87 1779.68,3589.68 1904.53,3714.53 1904.53,3844.53 P5.9
88: P5.12 U3.88 | length 364.2
  Top Layer w10: U3.88 1760,3600 1860,3700 P5.12
89: P5.11 U3.89 | length 472.3
  Top Layer w10: U3.89 1740.32,3610.32 1815,3685 1815.47,3685.47 1815.47,3818.44 1860,3862.97 P5.11
90: P5.14 U3.90 | length 339.1
  Top Layer w10: U3.90 1720.63,3625.63 1760,3665 P5.14
91: P5.13 U3.91 | length 447.2
  Top Layer w10: U3.91 1700.94,3640.94 1715,3655 1715.47,3655.47 1715.47,3855.47 P5.13
92: P5.16 U3.92 | length 331.6
  Top Layer w10: P5.16 1681.26,3778.74 U3.92
93: P5.15 U3.93 | length 460.3
  Top Layer w10: P5.15 1615.47,3855.47 1615.47,3774.53 1661.57,3728.43 U3.93
94: P5.18 U3.94 | length 356.7
  Top Layer w10: P5.18 1560,3785 1641.89,3703.11 U3.94
95: P5.17 U3.95 | length 485.4
  Top Layer w10: P5.17 1515.47,3855.47 1515.47,3779.53 1622.2,3672.8 U3.95
96: P5.20 U3.96 | length 381.8
  Top Layer w10: P5.20 1460,3790 1602.52,3647.48 U3.96
97: P5.19 U3.97 | length 518.1
  Top Layer w10: P5.19 1460,3885 1415.47,3840.47 1415.47,3781.56 1441.56,3755.47 1454.53,3755.47 1582.83,3627.17 U3.97
98: P5.22 U3.98 | length 415.7
  Top Layer w10: P5.22 1368.74,3800 1433.27,3735.47 1439.53,3735.47 1563.15,3611.85 U3.98
99: P5.21 U3.99 | length 557.9
  Top Layer w10: P5.21 1360,3862.97 1315.47,3818.44 1315.47,3781.56 1341.56,3755.47 1379.53,3755.47 1543.46,3591.54 U3.99
100: P5.24 U3.100 | length 455.4
  Top Layer w10: P5.24 1325,3735 1365,3735 1523.78,3576.22 U3.100
DS1307_SCL1: DS1307.6 R23.1 U3.57 | length 1450.7
  Top Layer w10: U3.57 2103.11,3061.89 2249.53,2915.47 2700.47,2915.47 2825,3040 v1(2885,3040)
  Bottom Layer w10: v1(2885,3040) 2980,2945 ; R23.1 2980,2945 ; DS1307.6 3095,3060 2980,2945
DS1307_SDA1: DS1307.5 R22.1 U3.56 | length 1398.7
  Top Layer w10: U3.56 2092.8,3042.2 2245,2890 2705,2890 2815,3000 v1(2875,3000) ; v1(2940,2935) 2985,2935 v1(3040,2880)
  Bottom Layer w10: v1(2875,3000) v1(2940,2935) ; v1(3040,2880) 3170,3010 DS1307.5
GND: 25LC1024.4 "SIM CARD1.1" C1.2 C2.2 C3.1 C4.1 C5.2 C6.1 C8.1 C9.1 C10.2 C11.2 C14.1 C15.1 C16.1 C17.1 C20.2 C24.1 C26.2 C27.1 C28.1 C29.2 C30.1 C31.1 C32.1 C33.1 C34.2 D4.2 DC_12V.1 DC_12V.2 DS1307.4 LM4871.7 MicroSDCard1.6 P1.1 P2.3 P3.1 P9.1 P12.4 P13.1 pad.0 pad.1 pad.2 pad.3 POWER.1 Q1.1 Q2.1 Q3.1 Q4.3 R2.1 R8.2 R9.2 R15.1 R21.1 RESET.1 SIM1.1 SIM1.2 SIM1.5 SIM1.10 SIM1.14 SIM1.37 SIM1.40 SIM1.41 SIM1.43 SIM1.57 SIM1.58 SIM1.60 SIM1.61 SIM1.64 SIM1.65 SIM1.77 SIM1.78 SIM1.80 U1.3 U2.1 U3.15 U3.31 U3.36 U3.45 U3.65 U3.75 U4.3 UA7805C.2 | length 22276.6
  Top Layer w10: P13.1 P9.1 1030,3470 1030,3630 P2.3 ; DC_12V.2 1015,4760 1075,4700 DC_12V.1 1300,4700 ; v1(1185,4400) 1300,4400 ; v1(1310,4250) 1310,4170 C33.1 1375,4095 v1(1375,4085) ; C32.1 1300,4400 ; U3.15 1510.63,3140.63 1590,3220 v1(1600,3220) 1657.43,3220 1710,3167.43 1710,3142.57 1675,3107.57 1675,2990 ; v1(1580,4760) C1.2 1560,4700 1300,4700 ; v1(1585,2785) 1595,2785 1622.2,2812.2 U3.31 1622.2,2952.2 1660,2990 1675,2990 ; U4.3 U4.3@1622.2,2672.2 ; U3.36 1720.63,2964.37 1695,2990 1675,2990 ; v1(1805,3125) 1790,3110 1790,3025 1897.8,2917.2 U3.45 ; U1.3 2180,4340 U2.1 C2.2 ; U3.65 1834.37,3219.37 v1(1825,3210) 1825,3255 1986.22,3416.22 U3.75 2091.22,3416.22 2345,3670 2655,3670 ; v1(2220,4860) C5.2 2224,4904 2345,4904 ; C2.2@2305,4565 C2.2 ; v1(2320,4540) C2.2 ; v1(2340,2340) 2336.9,2343.1 MicroSDCard1.6 2336.9,2555 2405,2623.1 v1(2405,2645) ; v1(2400,3080) 2400,3200 ; v1(2400,3280) 2400,3200 ; D4.2 2345,4904 ; v1(2700,3670) 2655,3670 ; v1(2775,4585) 2838.58,4585 Q4.3 Q4.3@2840,4585 ; v1(2905,3625) 3021.38,3625 SIM1.65 ; v1(2915,2465) 2945,2465 R15.1 3057.4,2542.6 Q3.1 3125,2544.02 3125,2545 v1(3135,2545) 3180,2500 P12.4 ; SIM1.64 SIM1.65 ; SIM1.61 3023.46,3888.46 3136.1,4001.1 SIM1.60 3240,3910 v1(3255,3895) 3300,3895 3318.74,3913.74 SIM1.58 ; v1(3145,2820) v1@3140,2820 ; v1(3220,3660) 3165,3605 3135,3605 ; v1(3270,4575) 3270.98,4575 Q2.1 3311,4534.98 R9.2 ; v1(3295,3220) 3229.65,3154.65 3135,3154.65 ; v1(3315,4320) 3315,4290 3340,4265 3340,4185 3318.74,4163.74 SIM1.58 ; SIM1.57 SIM1.58 ; SIM1.5 3397.48,2927.52 3395,2930 ; v1(3450,4575) 3450.98,4575 Q1.1 3491,4534.98 R8.2 3586,4395 C11.2 ; SIM1.10 3594.33,2925.67 ; SIM1.14 3751.81,2908.19 3730,2930 3590,2930 3395,2930 ; C10.2 C11.2 ; v1(3795,4395) C11.2 ; SIM1.43 3909.29,3910.71 3920,3900 4160,3900 ; 3988.03,3908.03 SIM1.41 ; C14.1 v1(4090,4395) 4175,4395 ; SIM1.37 4110,3666.46 4090,3686.46 4090,3765 4109.57,3784.57 SIM1.40 4204.57,3855.43 4160,3900 ; C17.1 4260,4335 ; v1(4325,4395) C20.2 4260,4395 ; LM4871.7 4415,4260 4340,4335 4260,4335 ; 1300,4400 1300,4700 ; C2.2 2280,4560 v1(2345,4625) 2345,4904 ; 2400,3200 2404.53,3204.53 2599.53,3204.53 2655,3260 2655,3670 ; SIM1.65 3112.91,3627.09 3135,3605 ; 3135,3154.65 SIM1.77 SIM1.78 3104.72,3115.28 3120,3100 3120,3051.54 3105,3036.54 SIM1.80 3023.46,2938.96 3140,2822.43 v1@3140,2820 ; 3135,3154.65 3135,3605 ; v1@3140,2820 SIM1.1 SIM1.2 3280,2820.63 3280,2915 3295,2930 3395,2930 ; 4160,3900 4175,3915 4175,4395 ; 4175,4395 4260,4395 ; 4260,4335 4260,4395
  Bottom Layer w10: P1.1@920,4395 P1.1 UA7805C.2 v1(1185,4400) 1220,4400 1310,4310 v1(1310,4250) ; RESET.1 1060,2420 C27.1 1120,2359.79 1159.79,2320 1240,2320 1360,2440 1360,2505 1415,2560 R21.1 1600,2650 U4.3 1610,2760 v1(1585,2785) ; P2.3 1055.47,3744.53 1055.47,3997.9 1187.57,4130 1330,4130 v1(1375,4085) 1440,4020 R2.1 U1.3 ; v1(1600,3220) 1805,3220 C26.2 ; v1(1805,3125) 1805,3190 C26.2 ; C26.2@1815,3200 C26.2 ; C6.1@2220,4855 v1(2220,4860) ; v1(2340,2340) C29.2 ; v1(2345,4625) 2565,4625 2605,4585 v1(2775,4585) 3260,4585 v1(3270,4575) 3310,4575 ; v1(2400,3080) 2400,2650 v1(2405,2645) ; v1(2700,3670) 2745,3625 v1(2905,3625) ; 25LC1024.4 v1(2915,2465) ; v1(3135,2545) 3135,2810 v1(3145,2820) ; P12.4 3235,2325 3405.21,2325 3440,2359.79 C16.1 POWER.1 3520,2460 4035,2460 4080,2505 4080,2560 ; v1(3220,3660) C9.1 3220,3860 v1(3255,3895) ; v1(3295,3220) v1@3296,3220 ; v1(3315,4320) 3310,4325 3310,4575 ; v1(3450,4575) 3310,4575 ; v1(3480,2930) DS1307.4 ; P3.1 3930,4530 v1(3795,4395) v1(4090,4395) ; v1(4325,4395) 4355,4365 4590,4365 v1(4620,4395)
GPS_RXD: D9.2 P11.3 SIM1.16 | length 1878.3
  Top Layer w10: D9.2 2860,3746 P11.3 ; v1(3740,3130) 3830.55,3039.45 SIM1.16
  Bottom Layer w10: P11.3 3570,3300 v1(3740,3130)
GPS_TXD: D8.2 P10.3 SIM1.15 | length 1927.3
  Top Layer w10: D8.2 2740,3786 P10.3 ; v1(3755,3050) 3791.18,3013.82 SIM1.15
  Bottom Layer w10: P10.3 2791.49,3300 2836.01,3255.47 3549.53,3255.47 v1(3755,3050)
GSM_RXD: D7.2 SIM1.68 U3.51 | length 2163
  Top Layer w10: U3.51 2096.22,2943.78 2235,2805 2280,2805 ; 2275,2805 2280,2805 ; v1(2605,3840) D7.2 ; v1(2920,3490) 2930,3490 2948.98,3508.98 SIM1.68 ; v1@2925,3485 2925,3377.57 2935,3367.57 2935,2987.5 2752.5,2805 2280,2805
  Bottom Layer w10: v1(2605,3840) 2605,3715 2830,3490 v1(2920,3490)
GSM_TXD: D6.2 SIM1.71 U3.52 | length 2123.3
  Top Layer w10: U3.52 2106.54,2963.46 2235,2835 2752.43,2835 2915,2997.57 2915,3350 v1(2890,3375) ; v1(2525,3840) D6.2 ; v1(2955,3390) 2955.87,3390.87 SIM1.71
  Bottom Layer w10: v1(2525,3840) 2525,3740 v1(2890,3375) 2905,3390 v1(2955,3390)
MCLR: C27.2 P2.1 R19.1 RESET.2 U3.13 | length 2034.4
  Top Layer w10: v1(1365,3160) 1385,3180 U3.13 1505,3180 1585,3260 v1(1585,3290)
  Bottom Layer w10: P2.1 1100,3897.03 1585,3412.03 v1(1585,3290) ; C27.2 1260,2444 1260,2455 RESET.2 R19.1 1195,2625 1195,2990 v1(1365,3160)
Net1_1: 1.1 C31.2 U3.64 | length 320
  Top Layer w10: U3.64 2159.68,3199.68 2240,3280 1.1
  Bottom Layer w10: 1.1 C31.2
Net1_2: 1.2 C30.2 U3.63 | length 328.2
  Top Layer w10: U3.63 2160,3180 1.2
  Bottom Layer w10: 1.2 C30.2
Net32.768MHz_1: 32.768.1 DS1307.1 | length 1159.6
  Bottom Layer w10: DS1307.1 3545,3160 3830,2875 4160,2875 4306.02,3021.02 32.768.1 32.768.1@4460,3020
Net32.768MHz_2: 32.768.2 DS1307.2 | length 1108
  Bottom Layer w10: DS1307.2 3540,3110 3800,2850 4180,2850 4228.98,2898.98 4455,2898.98 32.768.2
NetC7_1: C7.1 D1.1 P1.2 | length 806.3
  Top Layer w10: v1(1580,4100) 1580,4120
  Top Layer w20: D1.1 1580,4120
  Bottom Layer w20: P1.2 1480,4200 v1(1580,4100)
NetC10_1: C10.1 C11.1 C12.2 C13.2 P3.4 P3.5 SIM1.24 | length 2025.8
  Top Layer w10: P3.5 3752.83,4521.62 P3.4 3818.07,4501.93 3850,4470 C11.1 C13.2 C12.2 ; C10.1 C12.2 ; v1(4070,3855) 4070,3210 4125.35,3154.65 SIM1.24 ; v1(4070,4145) 4040,4145 3914,4271 C12.2
  Bottom Layer w10: v1(4070,3855) v1(4070,4145)
NetC12_1: C12.1 C13.1 C14.2 C15.2 P3.2 P3.3 SIM1.23 | length 1945.2
  Top Layer w10: v1(4035,3815) 4035,3205 4124.72,3115.28 SIM1.23 ; v1(4035,4315) C14.2 C12.1 C13.1 C15.2 4033.23,4395.77 4033.23,4678.23 P3.3 4083.55,4627.92 P3.2
  Bottom Layer w10: v1(4035,3815) v1(4035,4315)
NetC16_2: C16.2 POWER.2 Q3.3 SIM1.3 | length 609.4
  Top Layer w10: Q3.3 3318.74,2580 ; SIM1.3 3318.74,2580 ; POWER.2@3320,2460 3318.74,2461.26 3318.74,2580
  Bottom Layer w10: POWER.2@3320,2460 3320,2424 C16.2
NetC17_2: C17.2 LM4871.2 R25.1 | length 487.7
  Top Layer w10: C17.2 4260,3940 R25.1 4320,3880.21 4353.79,3914 4369,3914 4415,3960 LM4871.2
NetC18_1: C18.1 SIM1.22 | length 832.9
  Top Layer w10: SIM1.22 4325.91,3075.91 4455,3205 ; 4460,3210 4455,3205 ; C18.1 4520,3270 4455,3205
NetC18_2: C18.2 R17.1 | length 64
  Top Layer w10: C18.2 R17.1
NetC20_1: C20.1 C22.2 LM4871.5 P4.1 R24.2 | length 977.5
  Top Layer w10: C20.1 C22.2 ; v1(4445,4395) C22.2 ; R24.2 4539.54,4196.46 LM4871.5 4515,4265 4444,4336 C22.2
  Bottom Layer w10: v1(4445,4395) 4460,4410 P4.1
NetC22_1: C22.1 C24.2 LM4871.8 P4.2 P4.3 P4.4 P4.5 | length 1393.6
  Top Layer w10: P4.5 4282.83,4521.62 P4.4 4433.07,4501.93 4500,4435 C22.1 C24.2 4564,4677.47 P4.3 4609.6,4683.03 P4.2 ; v1(4325,4285) 4365,4245 LM4871.8
  Bottom Layer w10: P4.4 4295,4494.42 4295,4315 v1(4325,4285)
NetC25_1: C25.1 SIM1.21 | length 882.6
  Top Layer w10: SIM1.21 4331.54,3036.54 4480,3185 v1(4490,3185) ; C25.1 4490,3650 v1(4490,3320)
  Bottom Layer w10: v1(4490,3185) v1(4490,3320)
NetC25_2: C25.2 R20.1 | length 64
  Top Layer w10: C25.2 R20.1
NetC26_1: C26.1 U3.85 | length 137.6
  Top Layer w10: U3.85 1819.06,3340.94 v1(1820,3340)
NetC28_2: C28.2 F1.2 U3.30 | length 294.3
  Top Layer w10: U3.30 1602.52,3082.52 v1(1605,3085)
  Bottom Layer w10: C28.2 1600,3085 F1.2 v1(1605,3085)
NetD2_2: D2.2 R4.2 | length 80
  Top Layer w10: R4.2 D2.2
NetD3_2: D3.2 R5.2 | length 80
  Top Layer w10: R5.2 D3.2
NetD4_1: D4.1 R3.2 | length 84
  Top Layer w10: R3.2 D4.1
NetD5_2: D5.2 SIM1.42 | length 627.7
  Top Layer w10: v1(3890,4185) 3948.66,4126.34 SIM1.42
  Bottom Layer w10: D5.2 3855,4220 v1(3890,4185)
NetD6_1: D6.1 R11.1 | length 80
  Top Layer w10: D6.1 R11.1
NetD7_1: D7.1 R12.1 | length 80
  Top Layer w10: D7.1 R12.1
NetD8_1: D8.1 R13.1 | length 80
  Top Layer w10: D8.1 R13.1
NetD9_1: D9.1 R14.1 | length 80
  Top Layer w10: D9.1 R14.1
NetD10_1: D10.1 R16.2 | length 84
  Top Layer w10: D10.1 R16.2
NetD10_2: D10.2 Q4.1 | length 80.7
  Top Layer w10: D10.2 2800,4659.02 Q4.1
NetLM4871_3: LM4871.3 R20.2 R25.2 | length 203.6
  Top Layer w10: R25.2 4436,3880 R20.2 4465,3901 LM4871.3
NetLM4871_4: LM4871.4 R17.2 R24.1 | length 258
  Top Layer w10: R17.2 4515,3881 LM4871.4 4563.54,4003.54 R24.1
NetQ1_2: Q1.2 R6.2 R8.1 | length 146.6
  Top Layer w10: R6.2 R6.2@3377.6,4488.6 ; Q1.2 R6.2@3377.6,4488.6 ; R8.1 3433.6,4488.6 R6.2@3377.6,4488.6
NetQ1_3: Q1.3 R4.1 | length 83.6
  Top Layer w10: Q1.3 R4.1
NetQ2_2: Q2.2 R7.2 R9.1 | length 150.3
  Top Layer w10: Q2.2 3197.6,4488.6 R7.2 3251,4486 R9.1
NetQ2_3: Q2.3 R5.1 | length 83.6
  Top Layer w10: Q2.3 R5.1
NetQ3_2: Q3.2 R10.1 R15.2 | length 168.2
  Top Layer w10: R10.1 R15.2 3122.18,2616 Q3.2
NetQ4_2: Q4.2 R18.1 | length 177.5
  Top Layer w10: Q4.2 2877.4,4482.6 R18.1
NetR1_2: R1.2 R2.2 U1.5 | length 270.6
  Bottom Layer w10: R2.2@2060,4036 R2.2 2044,4099 2060,4115 U1.5 2115,4120 2140,4145 R1.2
NetR6_1: R6.1 SIM1.51 | length 519.7
  Top Layer w10: R6.1 3375,4360 3594.33,4140.67 SIM1.51
NetR7_1: R7.1 SIM1.52 | length 616.1
  Top Layer w10: R7.1 3260,4430 3554.96,4135.04 SIM1.52
NetR18_2: R18.2 SIM1.69 | length 1052.8
  Top Layer w10: R18.2 v1(2880,4425) ; v1(2960,3470) 2960.39,3469.61 SIM1.69
  Bottom Layer w10: v1(2880,4425) 2880,3865 2950,3795 2950,3480 v1(2960,3470)
NetSIM1_17: "SIM CARD1.5" SIM1.17 | length 267.3
  Top Layer w10: SIM1.17 3869.92,2570.08 v1(3875,2565)
  Bottom Layer w10: v1(3875,2565) 3880,2560 v1@3883.15,2560
NetSIM1_18: "SIM CARD1.4" SIM1.18 | length 793.9
  Top Layer w10: SIM1.18 3910,2820.71 v1(3910,2910)
  Bottom Layer w10: v1(3910,2910) 3910,2975 3980,3045 3980,3581.12 3982.5,3583.62
NetSIM1_19: "SIM CARD1.6" SIM1.19 | length 790
  Top Layer w10: v1(3885,3060) 3948.66,2996.34 SIM1.19
  Bottom Layer w10: v1(3885,3060) 3885,3583.62
NetSIM1_20: "SIM CARD1.2" SIM1.20 | length 801.7
  Top Layer w10: SIM1.20 3990,2821.97 v1(3990,2905)
  Bottom Layer w10: v1(3990,2905) 3990,2950 4080,3040 4080,3583.62
PGC: P2.5 U3.26 | length 828.8
  Top Layer w10: v1(1450,2895) 1462.24,2882.76 U3.26
  Bottom Layer w10: P2.5 1450,3150 v1(1450,2895)
PGD: P2.4 U3.27 | length 918.8
  Top Layer w10: U3.27 1543.46,2945 1565,2966.54 v1(1565,2980)
  Bottom Layer w10: P2.4 1495,3205 1495,3086.79 1565,3016.79 v1(1565,2980)
PWRKEY: R10.2 U3.48 | length 1184.8
  Top Layer w10: U3.48 1956.85,2778.15 2010,2725 2582.57,2725 2632.57,2675 2750,2675 2775,2700 R10.2
RS232_RXD: P11.1 P12.3 | length 823.6
  Bottom Layer w10: P11.1 2845,3085 2845,2900 3080,2665 P12.3
RS232_TXD: P10.1 P12.2 | length 819.4
  Bottom Layer w10: P10.1 2740,2890 2980,2650 P12.2
SCK1: 25LC1024.6 MicroSDCard1.5 U3.55 | length 1088.6
  Top Layer w10: v1(1950,3045) 1972.48,3022.52 U3.55 ; v1(2380,2535) 2380,2423.77 MicroSDCard1.5
  Bottom Layer w10: v1(1950,3045) 2380,2615 v1(2380,2535) 2470,2535 2490,2515 25LC1024.6
SDI1: 25LC1024.2 MicroSDCard1.7 U3.54 | length 1625.8
  Top Layer w10: v1(1900,3040) 1937.17,3002.83 U3.54 ; MicroSDCard1.7 v1@2293.6,2538.6 ; v1(2295,2540) v1@2293.6,2538.6 ; v1(2445,2690) 2383.6,2690 2293.6,2600 v1@2293.6,2538.6
  Bottom Layer w10: v1(1900,3040) 2295,2645 v1(2295,2540) ; v1(2445,2690) 2585,2690 2710,2565 25LC1024.2
SDO1: 25LC1024.5 MicroSDCard1.3 U3.53 | length 1285.3
  Top Layer w10: v1(1855,3040) 1911.85,2983.15 U3.53 ; v1(2465,2495) 2465,2425.38 MicroSDCard1.3
  Bottom Layer w10: v1(1855,3040) 2240,2655 2240,2552.57 2287.57,2505 2455,2505 v1(2465,2495) 2495,2465 25LC1024.5
SS1_CARD: MicroSDCard1.2 U3.23 | length 1814.3
  Top Layer w10: v1(1315,2900) 1315,2910 1388.15,2983.15 U3.23 ; v1(2240,2345) 2275,2310 2460,2310 2510.08,2360.08 MicroSDCard1.2
  Bottom Layer w10: v1(1315,2900) 1350,2865 1895,2865 2145,2615 2145,2520 2240,2425 v1(2240,2345)
SS1_EPP: 25LC1024.1 U3.22 | length 1996.3
  Top Layer w10: U3.22 1522.83,3002.83 v1(1525,3005) ; v1(2600,2305) 2665,2370 2665,2550 v1(2730,2615)
  Bottom Layer w10: v1(1525,3005) 1535,2995 1535,2967.57 1552.57,2950 1845,2950 2175,2620 2175,2530 2230,2475 2280,2425 2280,2340 2314,2306 2599,2306 v1(2600,2305) ; v1(2730,2615) 25LC1024.1
TEMP: R21.2 U3.44 U4.2 | length 608.4
  Top Layer w10: U3.44 1878.11,2826.89 1900,2805 v1(1905,2805)
  Bottom Layer w10: U4.2 1656,2656 R21.2 1770,2560 1905,2695 v1(1905,2805)
U2RX: P11.2 U3.50 | length 1377.9
  Top Layer w10: U3.50 1996.22,2813.78 2040,2770 2680,2770 v1(2700,2750)
  Bottom Layer w10: v1(2700,2750) 2695.47,2754.53 2695.47,3135.74 2715.2,3155.47 2758.44,3155.47 2802.97,3200 P11.2
U2TX: P10.2 U3.49 | length 1330.8
  Top Layer w10: U3.49 1976.54,2798.46 2030,2745 2605,2745 v1(2645,2705)
  Bottom Layer w10: v1(2645,2705) 2645,3113.55 2731.45,3200 P10.2
VCC: C1.1 C3.2 C7.2 C32.2 D1.2 DC_12V.0 U1.1 U1.2 UA7805C.1 | length 2247.5
  Top Layer w10: v1(1180,4300) 1480,4300 C32.2@1580,4400 ; v1(1580,4845) C1.1 ; v1(1665,4100) 1665,4140 D1.2 D1.2@1740,4215
  Top Layer w20: DC_12V.0 1335,4900 C1.1 1690,4900 1740,4850 1740,4400 ; C32.2@1580,4400 1740,4400 ; D1.2 1860,4180 ; D1.2@1740,4215 1740,4400 ; U1.1 1860,4180 ; U1.2 1860,4220 1860,4180
  Bottom Layer w10: C3.2 v1(1580,4845) ; C7.2 v1(1665,4100)
pads on no net: "SIM CARD1.3" DS1307.7 MicroSDCard1.1 MicroSDCard1.8 P2.6 P5.23 P6.13 SIM1.4 SIM1.6 SIM1.7 SIM1.8 SIM1.9 SIM1.11 SIM1.12 SIM1.13 SIM1.25 SIM1.26 SIM1.27 SIM1.28 SIM1.29 SIM1.30 SIM1.31 SIM1.32 SIM1.33 SIM1.34 SIM1.35 SIM1.36 SIM1.38 SIM1.39 SIM1.44 SIM1.45 SIM1.46 SIM1.47 SIM1.48 SIM1.49 SIM1.50 SIM1.53 SIM1.54 SIM1.55 SIM1.56 SIM1.59 SIM1.66 SIM1.67 SIM1.70 SIM1.72 SIM1.73 SIM1.74 SIM1.75 SIM1.76 SIM1.79 U1.6 UA7805C.4
copper on no net: | length 339
  Top Layer w10: 2134.06,3120.94 2250,3005 2425,3005

## Polygon pours and split planes (outlines as drawn)
GND on Top Layer "TOP" (solid, remove dead copper, pour order 1000): 751.97,5000 4740.16,5000 4740.16,2283.46 759.84,2283.46 759.84,4992.13 751.97,5000
GND on Bottom Layer "BOT" (solid, remove dead copper, pour order 1001): 755.91,5000 4740.16,5000 4740.16,2283.46 759.84,2283.46 759.84,4996.06

## Keep-outs
Keep-Out Layer:
  lines w5: 4740,2300 4740,2285 3735.11,2285 1905,2285 1010,2285 815,2285 760,2285 760,5000 775,5000 805,5000 4740,5000 4740,2300.08

## Silkscreen, mask and mechanical layers (free items; w line width, h text height)
Top Overlay:
  text "GSM_ANT" at 4708.66,2897.64 h40 r90
  text "GPS_ANT" at 4153.54,2354.33 h40

## Text inside footprints (layer, text, board x,y; h text height)
P5: Top Overlay "2" at 2460,3820 h50 r180; Top Overlay "1" at 2460,3920 h50 r180
P6: Top Overlay "1" at 1300,2360 h50; Top Overlay "2" at 1300,2460 h50
P7: Top Overlay "2" at 920,3360 h50 r270; Top Overlay "1" at 820,3360 h50 r270
P8: Top Overlay "8" at 2500,2860 h50 r90; Top Overlay "1" at 2600,2860 h50 r90
"SIM CARD1": Bottom Overlay "<<Lock" at 3625,2955 h60 r270; Bottom Overlay "Open>>" at 4190,2975 h60 r270